# EAGLE board cameraCableBoardPanelizedSmall (EAGLE 9.4.2)
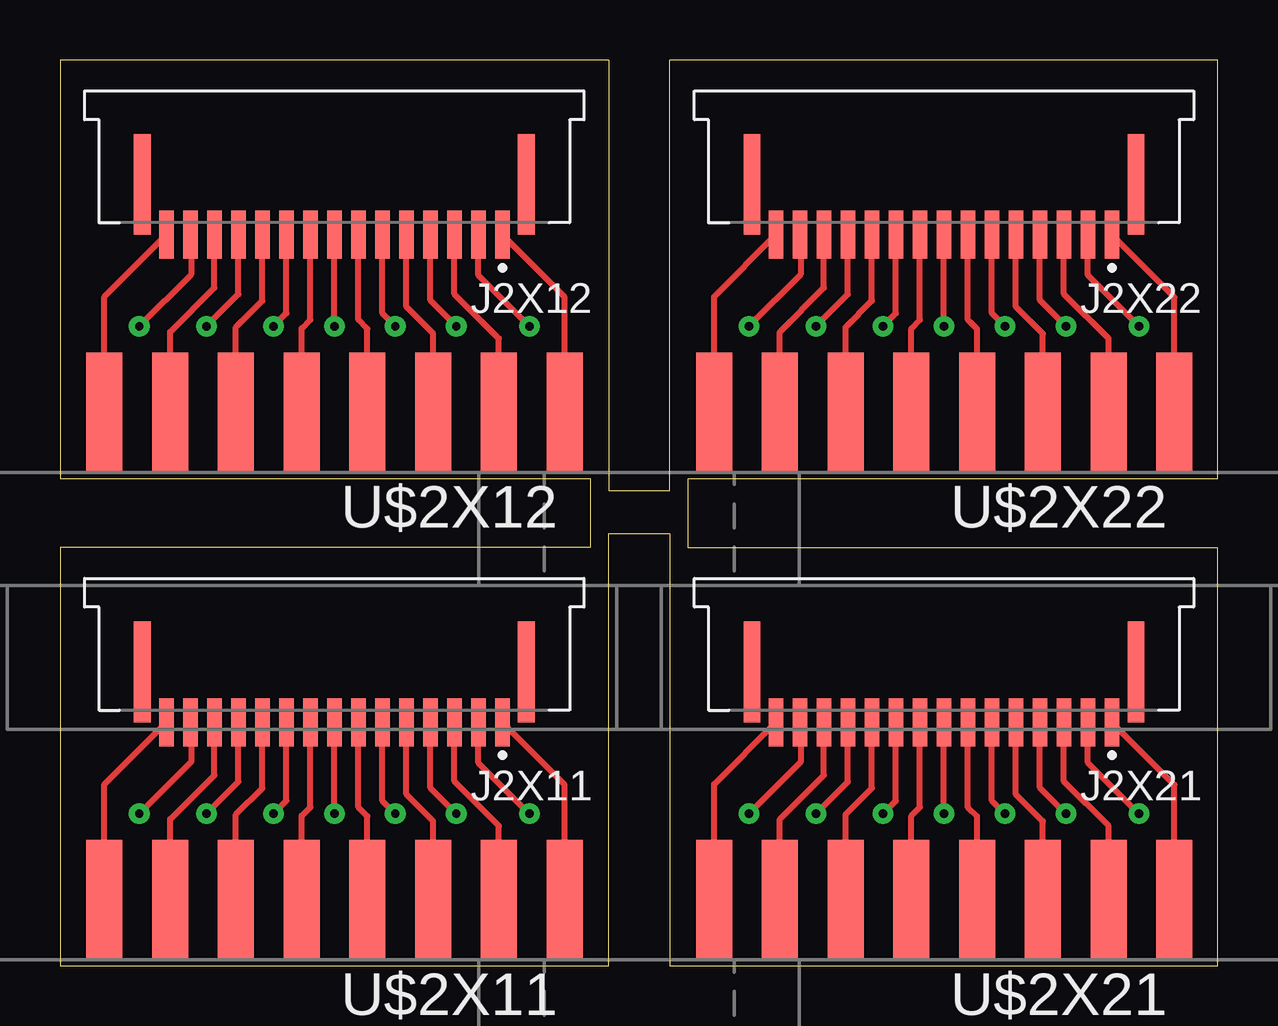
[diagram p0: board, top side]
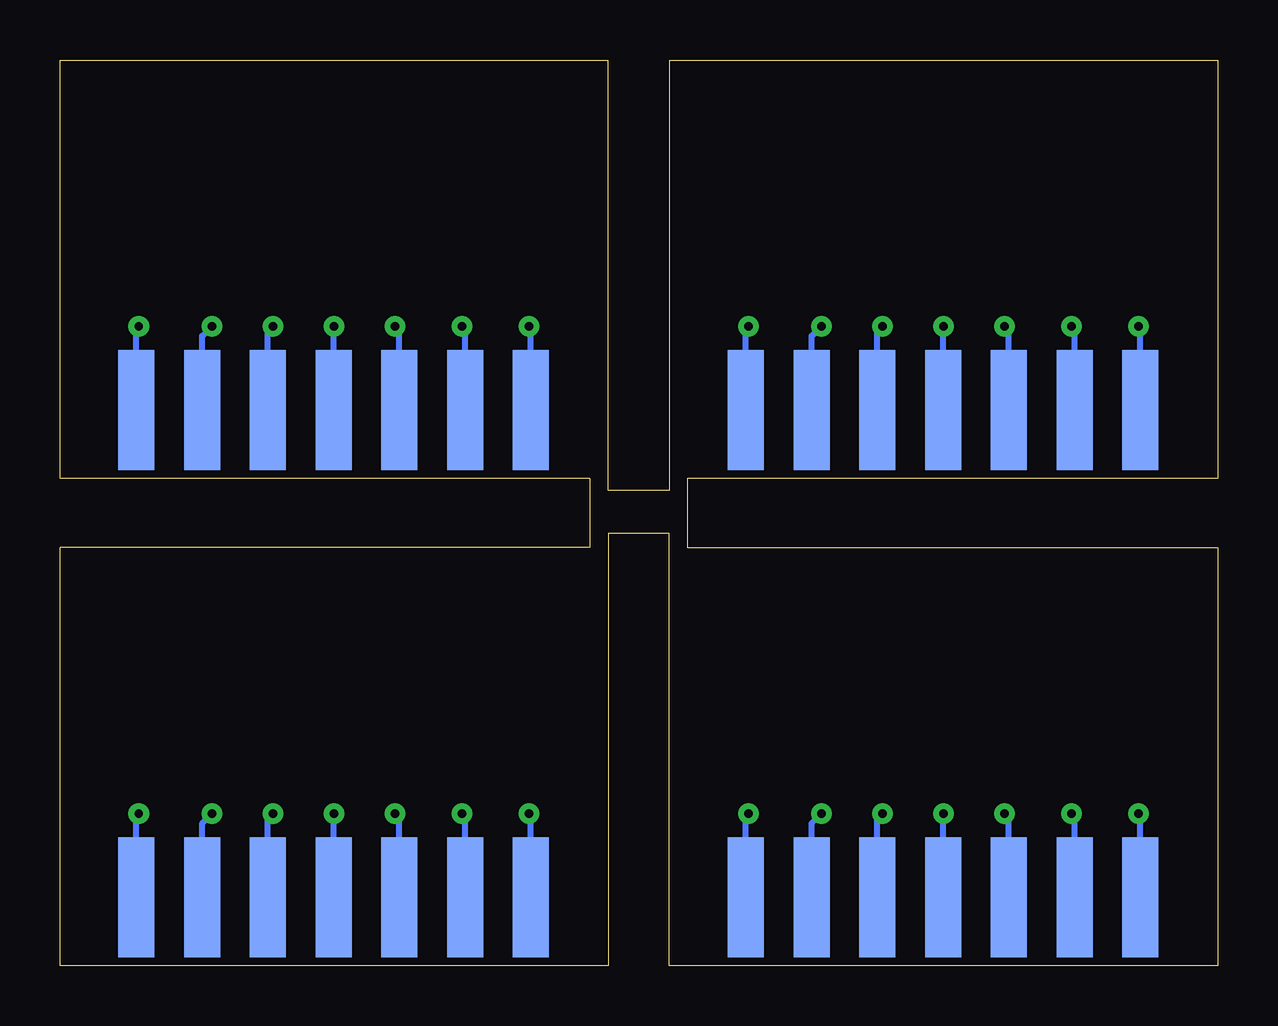
[diagram p1: board, bottom side, seen from below]

Size 48.24 x 37.77 mm. Coordinates in mm from the lower left corner, seen from the top.
Outline: 0,0 22.86,0 22.86,18.03 25.4,18.03 25.4,0 48.24,0 48.24,17.45 26.16,17.45 26.16,20.32 48.24,20.32 48.24,37.77 25.4,37.77 25.4,19.81 22.86,19.81 22.86,37.77 0,37.77 0,20.32 22.1,20.32 22.1,17.45 0,17.45 0,0
Copper layers (1*16): Top 0.035mm / dielectric 1.5mm / Bottom 0.035mm
Design rules "SparkFun-2-layer-STANDARD_13milDrill": minimum track width 10mil, minimum drill 13mil, track to track 10mil, track to pad 8mil, pad to pad 8mil, via to via 10mil, smd to smd 8mil, copper to edge 8mil, drill to drill 8mil, minimum pad ring 10mil, minimum via ring 10mil, stop-mask expansion 4mil, vias tented up to drill 25mil, thermal gap 10mil

## Footprints (pad centres in the part's own frame; a part is rotated, then mirrored left to right if it is on the bottom)
AMPHENOL_SFW15R-1STE1LF = smd 0.6 x 2: 1 -7,0; 2 -6,0; 3 -5,0; 4 -4,0; 5 -3,0; 6 -2,0; 7 -1,0; 8 0,0; 9 1,0; 10 2,0; 11 3,0; 12 4,0; 13 5,0; 14 6,0; 15 7,0 | smd 0.7 x 4.2: S1 -8,-2.1; S2 8,-2.1
DB15-BOARD-EDGE = smd 1.5 x 5: P1 9.58,-2.5; P2 6.84,-2.5; P3 4.1,-2.5; P4 1.36,-2.5; P5 -1.38,-2.5; P6 -4.12,-2.5; P7 -6.86,-2.5; P8 -9.6,-2.5 | smd 1.5 x 5 bottom: P9 8.21,-2.61; P10 5.47,-2.61; P11 2.73,-2.61; P12 -0.01,-2.61; P13 -2.75,-2.61; P14 -5.49,-2.61; P15 -8.23,-2.61

## Placement (x,y rotation side)
J2X11  [AMPHENOL_SFW15R-1STE1LF]  11.43,10.16 180 top
J2X12  [AMPHENOL_SFW15R-1STE1LF]  11.43,30.48 180 top
J2X21  [AMPHENOL_SFW15R-1STE1LF]  36.83,10.16 180 top
J2X22  [AMPHENOL_SFW15R-1STE1LF]  36.83,30.48 180 top
U$2X11  [DB15-BOARD-EDGE]  11.43,0.25 180 top
U$2X12  [DB15-BOARD-EDGE]  11.43,20.57 180 top
U$2X21  [DB15-BOARD-EDGE]  36.83,0.25 180 top
U$2X22  [DB15-BOARD-EDGE]  36.83,20.57 180 top

## Library data of the parts
J2X11 J2X12 J2X21 J2X22 U$2X11 U$2X12 U$2X21 U$2X22 = RPi-Parts

## Nets
CAM1X11: J2X11.1 U$2X11.P8
CAM1X12: J2X12.1 U$2X12.P8
CAM1X21: J2X21.1 U$2X21.P8
CAM1X22: J2X22.1 U$2X22.P8
CAM2X11: J2X11.2 U$2X11.P15
CAM2X12: J2X12.2 U$2X12.P15
CAM2X21: J2X21.2 U$2X21.P15
CAM2X22: J2X22.2 U$2X22.P15
CAM3X11: J2X11.3 U$2X11.P7
CAM3X12: J2X12.3 U$2X12.P7
CAM3X21: J2X21.3 U$2X21.P7
CAM3X22: J2X22.3 U$2X22.P7
CAM4X11: J2X11.4 U$2X11.P14
CAM4X12: J2X12.4 U$2X12.P14
CAM4X21: J2X21.4 U$2X21.P14
CAM4X22: J2X22.4 U$2X22.P14
CAM5X11: J2X11.5 U$2X11.P6
CAM5X12: J2X12.5 U$2X12.P6
CAM5X21: J2X21.5 U$2X21.P6
CAM5X22: J2X22.5 U$2X22.P6
CAM6X11: J2X11.6 U$2X11.P13
CAM6X12: J2X12.6 U$2X12.P13
CAM6X21: J2X21.6 U$2X21.P13
CAM6X22: J2X22.6 U$2X22.P13
CAM7X11: J2X11.7 U$2X11.P5
CAM7X12: J2X12.7 U$2X12.P5
CAM7X21: J2X21.7 U$2X21.P5
CAM7X22: J2X22.7 U$2X22.P5
CAM8X11: J2X11.8 U$2X11.P12
CAM8X12: J2X12.8 U$2X12.P12
CAM8X21: J2X21.8 U$2X21.P12
CAM8X22: J2X22.8 U$2X22.P12
CAM9X11: J2X11.9 U$2X11.P4
CAM9X12: J2X12.9 U$2X12.P4
CAM9X21: J2X21.9 U$2X21.P4
CAM9X22: J2X22.9 U$2X22.P4
CAM10X11: J2X11.10 U$2X11.P11
CAM10X12: J2X12.10 U$2X12.P11
CAM10X21: J2X21.10 U$2X21.P11
CAM10X22: J2X22.10 U$2X22.P11
CAM11X11: J2X11.11 U$2X11.P3
CAM11X12: J2X12.11 U$2X12.P3
CAM11X21: J2X21.11 U$2X21.P3
CAM11X22: J2X22.11 U$2X22.P3
CAM12X11: J2X11.12 U$2X11.P10
CAM12X12: J2X12.12 U$2X12.P10
CAM12X21: J2X21.12 U$2X21.P10
CAM12X22: J2X22.12 U$2X22.P10
CAM13X11: J2X11.13 U$2X11.P2
CAM13X12: J2X12.13 U$2X12.P2
CAM13X21: J2X21.13 U$2X21.P2
CAM13X22: J2X22.13 U$2X22.P2
CAM14X11: J2X11.14 U$2X11.P9
CAM14X12: J2X12.14 U$2X12.P9
CAM14X21: J2X21.14 U$2X21.P9
CAM14X22: J2X22.14 U$2X22.P9
CAM15X11: J2X11.15 U$2X11.P1
CAM15X12: J2X12.15 U$2X12.P1
CAM15X21: J2X21.15 U$2X21.P1
CAM15X22: J2X22.15 U$2X22.P1

## Tracks (layer width: path | path; a pad name or v marks a point on that pad's centre or on a via)
CAM1X11
  Top 0.254: U$2X11.P8 21.03,7.56 J2X11.1
CAM1X12
  Top 0.254: U$2X12.P8 21.03,27.88 J2X12.1
CAM1X21
  Top 0.254: U$2X21.P8 46.43,7.56 J2X21.1
CAM1X22
  Top 0.254: U$2X22.P8 46.43,27.88 J2X22.1
CAM2X11  (via drill 0.35 pad 0.86)
  Top 0.254: v19.56,6.35 17.43,8.48 J2X11.2
  Bottom 0.254: U$2X11.P15 19.66,6.25 v19.56,6.35
CAM2X12  (via drill 0.35 pad 0.86)
  Top 0.254: v19.56,26.67 17.43,28.8 J2X12.2
  Bottom 0.254: U$2X12.P15 19.66,26.57 v19.56,26.67
CAM2X21  (via drill 0.35 pad 0.86)
  Top 0.254: v44.96,6.35 42.83,8.48 J2X21.2
  Bottom 0.254: U$2X21.P15 45.06,6.25 v44.96,6.35
CAM2X22  (via drill 0.35 pad 0.86)
  Top 0.254: v44.96,26.67 42.83,28.8 J2X22.2
  Bottom 0.254: U$2X22.P15 45.06,26.57 v44.96,26.67
CAM3X11
  Top 0.254: U$2X11.P7 18.29,5.84 16.43,7.7 J2X11.3
CAM3X12
  Top 0.254: U$2X12.P7 18.29,26.16 16.43,28.02 J2X12.3
CAM3X21
  Top 0.254: U$2X21.P7 43.69,5.84 41.83,7.7 J2X21.3
CAM3X22
  Top 0.254: U$2X22.P7 43.69,26.16 41.83,28.02 J2X22.3
CAM4X11  (via drill 0.35 pad 0.86)
  Top 0.254: v16.51,6.35 15.43,7.43 J2X11.4
  Bottom 0.254: U$2X11.P14 16.92,5.94 v16.51,6.35
CAM4X12  (via drill 0.35 pad 0.86)
  Top 0.254: v16.51,26.67 15.43,27.75 J2X12.4
  Bottom 0.254: U$2X12.P14 16.92,26.26 v16.51,26.67
CAM4X21  (via drill 0.35 pad 0.86)
  Top 0.254: v41.91,6.35 40.83,7.43 J2X21.4
  Bottom 0.254: U$2X21.P14 42.32,5.94 v41.91,6.35
CAM4X22  (via drill 0.35 pad 0.86)
  Top 0.254: v41.91,26.67 40.83,27.75 J2X22.4
  Bottom 0.254: U$2X22.P14 42.32,26.26 v41.91,26.67
CAM5X11
  Top 0.254: U$2X11.P6 15.55,6.04 14.43,7.16 J2X11.5
CAM5X12
  Top 0.254: U$2X12.P6 15.55,26.36 14.43,27.48 J2X12.5
CAM5X21
  Top 0.254: U$2X21.P6 40.95,6.04 39.83,7.16 J2X21.5
CAM5X22
  Top 0.254: U$2X22.P6 40.95,26.36 39.83,27.48 J2X22.5
CAM6X11  (via drill 0.35 pad 0.86)
  Top 0.254: v13.97,6.35 13.43,6.89 J2X11.6
  Bottom 0.254: U$2X11.P13 14.18,6.14 v13.97,6.35
CAM6X12  (via drill 0.35 pad 0.86)
  Top 0.254: v13.97,26.67 13.43,27.21 J2X12.6
  Bottom 0.254: U$2X12.P13 14.18,26.46 v13.97,26.67
CAM6X21  (via drill 0.35 pad 0.86)
  Top 0.254: v39.37,6.35 38.83,6.89 J2X21.6
  Bottom 0.254: U$2X21.P13 39.58,6.14 v39.37,6.35
CAM6X22  (via drill 0.35 pad 0.86)
  Top 0.254: v39.37,26.67 38.83,27.21 J2X22.6
  Bottom 0.254: U$2X22.P13 39.58,26.46 v39.37,26.67
CAM7X11
  Top 0.254: U$2X11.P5 12.81,6.24 12.43,6.62 J2X11.7
CAM7X12
  Top 0.254: U$2X12.P5 12.81,26.56 12.43,26.94 J2X12.7
CAM7X21
  Top 0.254: U$2X21.P5 38.21,6.24 37.83,6.62 J2X21.7
CAM7X22
  Top 0.254: U$2X22.P5 38.21,26.56 37.83,26.94 J2X22.7
CAM8X11  (via drill 0.35 pad 0.86)
  Top 0.254: v11.43,6.35 J2X11.8
  Bottom 0.254: U$2X11.P12 v11.44,6.34 v11.43,6.35
CAM8X12  (via drill 0.35 pad 0.86)
  Top 0.254: v11.43,26.67 J2X12.8
  Bottom 0.254: U$2X12.P12 v11.44,26.66 v11.43,26.67
CAM8X21  (via drill 0.35 pad 0.86)
  Top 0.254: v36.83,6.35 J2X21.8
  Bottom 0.254: U$2X21.P12 v36.84,6.34 v36.83,6.35
CAM8X22  (via drill 0.35 pad 0.86)
  Top 0.254: v36.83,26.67 J2X22.8
  Bottom 0.254: U$2X22.P12 v36.84,26.66 v36.83,26.67
CAM9X11
  Top 0.254: U$2X11.P4 10.07,6.26 10.43,6.62 J2X11.9
CAM9X12
  Top 0.254: U$2X12.P4 10.07,26.58 10.43,26.94 J2X12.9
CAM9X21
  Top 0.254: U$2X21.P4 35.47,6.26 35.83,6.62 J2X21.9
CAM9X22
  Top 0.254: U$2X22.P4 35.47,26.58 35.83,26.94 J2X22.9
CAM10X11  (via drill 0.35 pad 0.86)
  Top 0.254: v8.89,6.35 9.43,6.89 J2X11.10
  Bottom 0.254: U$2X11.P11 8.7,6.16 v8.89,6.35
CAM10X12  (via drill 0.35 pad 0.86)
  Top 0.254: v8.89,26.67 9.43,27.21 J2X12.10
  Bottom 0.254: U$2X12.P11 8.7,26.48 v8.89,26.67
CAM10X21  (via drill 0.35 pad 0.86)
  Top 0.254: v34.29,6.35 34.83,6.89 J2X21.10
  Bottom 0.254: U$2X21.P11 34.1,6.16 v34.29,6.35
CAM10X22  (via drill 0.35 pad 0.86)
  Top 0.254: v34.29,26.67 34.83,27.21 J2X22.10
  Bottom 0.254: U$2X22.P11 34.1,26.48 v34.29,26.67
CAM11X11
  Top 0.254: U$2X11.P3 7.33,6.31 8.43,7.41 J2X11.11
CAM11X12
  Top 0.254: U$2X12.P3 7.33,26.63 8.43,27.73 J2X12.11
CAM11X21
  Top 0.254: U$2X21.P3 32.73,6.31 33.83,7.41 J2X21.11
CAM11X22
  Top 0.254: U$2X22.P3 32.73,26.63 33.83,27.73 J2X22.11
CAM12X11  (via drill 0.35 pad 0.86)
  Top 0.254: v6.1,6.35 7.43,7.68 J2X11.12
  Bottom 0.254: U$2X11.P10 5.96,6.21 v6.1,6.35
CAM12X12  (via drill 0.35 pad 0.86)
  Top 0.254: v6.1,26.67 7.43,28 J2X12.12
  Bottom 0.254: U$2X12.P10 5.96,26.53 v6.1,26.67
CAM12X21  (via drill 0.35 pad 0.86)
  Top 0.254: v31.5,6.35 32.83,7.68 J2X21.12
  Bottom 0.254: U$2X21.P10 31.36,6.21 v31.5,6.35
CAM12X22  (via drill 0.35 pad 0.86)
  Top 0.254: v31.5,26.67 32.83,28 J2X22.12
  Bottom 0.254: U$2X22.P10 31.36,26.53 v31.5,26.67
CAM13X11
  Top 0.254: U$2X11.P2 4.59,6.11 6.43,7.95 J2X11.13
CAM13X12
  Top 0.254: U$2X12.P2 4.59,26.43 6.43,28.27 J2X12.13
CAM13X21
  Top 0.254: U$2X21.P2 29.99,6.11 31.83,7.95 J2X21.13
CAM13X22
  Top 0.254: U$2X22.P2 29.99,26.43 31.83,28.27 J2X22.13
CAM14X11  (via drill 0.35 pad 0.86)
  Top 0.254: v3.3,6.35 5.46,8.51 5.46,10.13 J2X11.14
  Bottom 0.254: U$2X11.P9 3.22,6.27 v3.3,6.35
CAM14X12  (via drill 0.35 pad 0.86)
  Top 0.254: v3.3,26.67 5.46,28.83 5.46,30.45 J2X12.14
  Bottom 0.254: U$2X12.P9 3.22,26.59 v3.3,26.67
CAM14X21  (via drill 0.35 pad 0.86)
  Top 0.254: v28.7,6.35 30.86,8.51 30.86,10.13 J2X21.14
  Bottom 0.254: U$2X21.P9 28.62,6.27 v28.7,6.35
CAM14X22  (via drill 0.35 pad 0.86)
  Top 0.254: v28.7,26.67 30.86,28.83 30.86,30.45 J2X22.14
  Bottom 0.254: U$2X22.P9 28.62,26.59 v28.7,26.67
CAM15X11
  Top 0.254: U$2X11.P1 1.85,7.58 J2X11.15
CAM15X12
  Top 0.254: U$2X12.P1 1.85,27.9 J2X12.15
CAM15X21
  Top 0.254: U$2X21.P1 27.25,7.58 J2X21.15
CAM15X22
  Top 0.254: U$2X22.P1 27.25,27.9 J2X22.15

## Text on the board
tDocu: Estimated Clock Skew: 3.8picoseconds | Estimated Clock Skew: 3.8picoseconds | Estimated Clock Skew: 3.8picoseconds | Estimated Clock Skew: 3.8picoseconds